# Altium PCB Board_LRA_Altium.pcbdoc
Units mil, origin at the board's own origin, x right, y up, seen from the top; angles counter-clockwise.
Board outline 2801.59 x 1943.74 mil, 2 copper layers (Top Layer, Bottom Layer); 24 components, 15 nets, 63 pads, 17 vias.
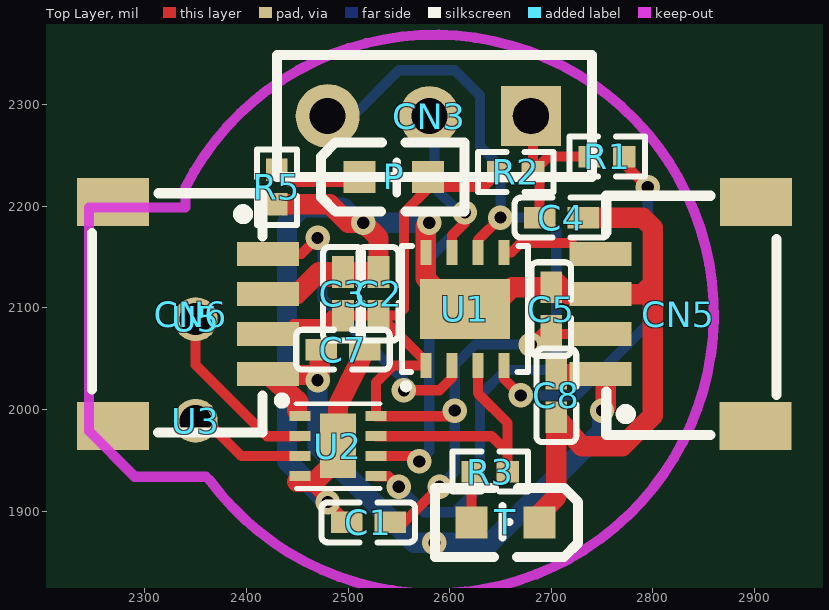
[diagram p0: Top Layer view]
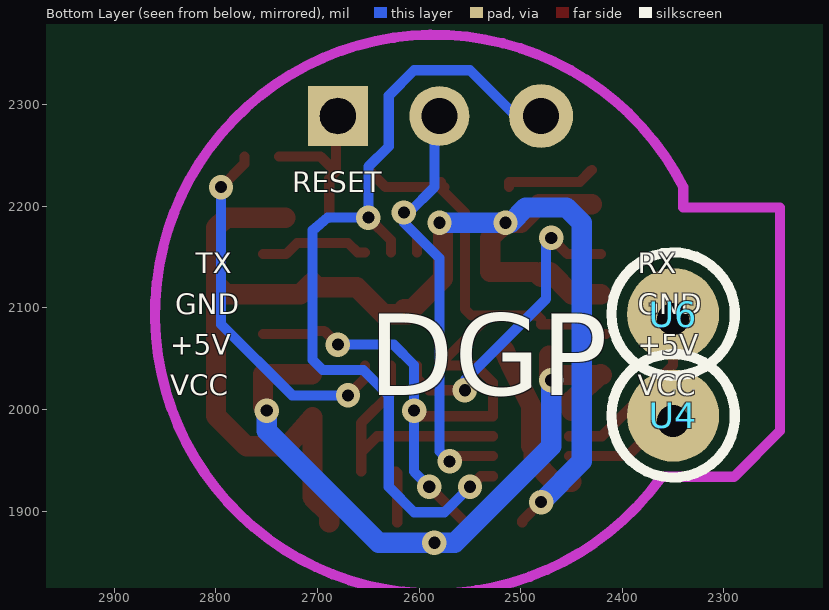
[diagram p1: Bottom Layer view, seen from below]

## Layer stack, top to bottom
Top Layer: signal copper (thickness not stored)
Dielectric: dielectric 12.6, FR-4, Dk 4.8
Bottom Layer: signal copper (thickness not stored)

## Board outline
3801.59,1000 1000,1000 1000,2943.74 3801.59,2943.74

## Components (designator, comment, footprint, x,y, rotation, side; value= is the part's Value field where it differs from the comment)
C1 "1uF" C0402 2520,1888.78 r0 top
C2 "100nF" C0402_NEW 2530,2113.78 r90 top
C3 "22uF" C0402 2495,2113.78 r270 top
C4 "100nF" C0402_NEW 2710,2188.78 r180 top
C5 "22uF" C0402 2700,2098.78 r270 top
C7 "22uF" C0402 2495,2058.78 r180 top
C8 "22uF" C0402 2705,2013.78 r90 top
CN3 "3 Pads Solder" 3PADS-JED 2580,2288.78 r270 top
CN5 "SM04B-SRSS-TB (LF)(SN)" CONN-SMD_4P-P1.00_SM04B-SRSS-TB-LF-SN 2825,2093.78 r90 top
CN6 "SM04B-SRSS-TB (LF)(SN)" CONN-SMD_4P-P1.00_SM04B-SRSS-TB-LF-SN 2345,2093.78 r270 top
P "19-213/GVC-CK0LLY/3T(HW)" LED0603-R-RD 2545,2228.78 r0 top
R1 "300Ω" R0402 2755,2248.78 r0 top
R2 "10kΩ" R0402 2665,2233.78 r180 top
R3 "1kΩ" R0402 2640,1938.78 r180 top
R5 "10kΩ" R0402 2430,2218.78 r90 top
T "19-213/GVC-CK0LLY/3T(HW)" LED0603-R-RD 2655,1888.78 r180 top
U1 "PIC16F18313-E/RF" DFN-8_L3.0-W3.0-P0.65-BL-EP 2615,2098.78 r0 top
U2 "DRV8837DSGR" WSON-8_L2.0-W2.0-P0.50-TL-EP 2490,1963.78 r0 top
U3 "Solder-Pad" SOLDER-PAD 2350,1988.78 r0 top
U4 "CONN-SMD_YTC1P-3015-01" CONN-SMD_YTC1P-3015-01 2350,1993.78 r0 bottom
U5 "Solder-Pad" SOLDER-PAD 2350,2088.78 r0 top
U6 "CONN-SMD_YTC1P-3015-01" CONN-SMD_YTC1P-3015-01 2350,2093.78 r0 bottom
? "" ? 2585,1634.94 r0 top
? "" ? 3149.79,2091.29 r0 top

## Footprints (in the part's own frame and the unit in brackets; to place one, negate y for a bottom-side part, rotate by r counter-clockwise, add the part's x,y. Pads: shape width x height; smd on the part's side, far side on the other; paste and mask are expansions set on the pad)
3PADS-JED [mm]
  rect 1.5x1.5 hole 0.9 slot 0.9 at 0 deg paste+0 mask+0.102: 1(0,2.54)
  round 1.5 hole 0.9 paste+0 mask+0.102: 2(0,0)
  round 1.6 hole 0.9 paste+0 mask+0.102: 3(0,-2.54)
  silkscreen extent -1.52,-3.81 1.52,4.06
C0402 [mm]
  rect 0.79x0.54 smd paste-100 mask+0.051: 1(-0.545,0) 2(0.545,0)
  silkscreen extent -1.17,-0.5 1.17,0.5
C0402_NEW [mm]
  rect 0.79x0.54 smd paste-100 mask+0.051: 1(-0.545,0) 2(0.545,0)
  silkscreen extent -1.17,-0.5 1.17,0.5
CONN-SMD_4P-P1.00_SM04B-SRSS-TB-LF-SN [mm]
  rect 0.6x1.55 smd paste+0 mask+0.051: 1(-1.5,1.938) 2(-0.5,1.938) 3(0.501,1.938) 4(1.5,1.938)
  rect 1.2x1.8 smd paste+0 mask+0.051: 5(2.8,-1.938) 6(-2.8,-1.938)
  silkscreen extent -3.02,-2.46 2.96,1.8
CONN-SMD_YTC1P-3015-01 [mm]
  round 2.3 smd paste+0 mask+0.05: 1(0,0)
  silkscreen extent -1.54,-1.54 1.55,1.54
DFN-8_L3.0-W3.0-P0.65-BL-EP [mm]
  rect 0.28x0.625 smd paste+0 mask+0.051: 1(-0.975,-1.412) 2(-0.325,-1.412) 3(0.325,-1.412) 4(0.975,-1.412) 5(0.975,1.412) 6(0.325,1.412) 7(-0.325,1.412) 8(-0.975,1.412)
  rect 2.25x1.5 smd paste+0 mask+0.051: 9(0,0)
  silkscreen extent -1.58,-2.01 1.58,1.58
LED0603-R-RD [mm]
  rect 0.8x0.8 smd paste+0 mask+0.051: 1(0.851,0) 2(-0.851,0)
  silkscreen extent -1.82,-0.86 1.77,0.86
R0402 [mm]
  rect 0.566x0.54 smd paste-100 mask+0.051: 1(-0.433,0) 2(0.433,0)
  silkscreen extent -0.94,-0.5 0.94,0.5
SOLDER-PAD [mm]
  round 1.1 hole 0.8 paste+0 mask+0.102: 1(0,0)
WSON-8_L2.0-W2.0-P0.50-TL-EP [mm]
  rect 0.521x0.25 smd paste+0 mask+0.051: 1(-0.95,0.75) 2(-0.95,0.25) 3(-0.95,-0.25) 4(-0.95,-0.75) 5(0.95,-0.75) 6(0.95,-0.25) 7(0.95,0.25) 8(0.95,0.75)
  rect 0.902x1.613 smd paste+0 mask+0.051: 9(0,0.013)
  silkscreen extent -1.47,-1.06 1.06,1.22
? [mil]

## Via types
v1: diameter 24.02, hole 12, Top Layer to Bottom Layer, tented both sides, 17 vias

## Nets (pads, with @x,y where several pads share a name; then routed paths per layer and width w, separated by ;. In a path a pad name is that pad's centre, name@x,y a point inside that pad or via, vN(x,y) a via of type N, cw(c..) or ccw(c..) an arc to the next point about the centre after c; other vN are vias at no path point)
+5V: C1.2 C2.1 C3.2 C5.2 CN5.2 CN6.3 P.1 R2.2 U1.1 U2.8 | length 952.2
  Top Layer w10: CN6.3@2416.3,2074.08 2436.8,2074.08 2446.5,2083.78 2480,2083.78 ; 2480,2088.78 2483.5,2092.28 C2.1 ; C1.2 2555,1888.78 v1(2590,1923.78) ; P.1@2575,2218.78 2633,2218.78 R2.2 ; P.1@2578.5,2223.78 2578.5,2217.28 2555,2193.78 2555,2098.78 2548.5,2092.28 C2.1 ; v1(2605,1998.78) 2599.5,1993.28 U2.8 2527.4,2026.18 2544.4,2043.18 U1.1 2576.6,2047.18 2531.5,2092.28 C2.1 ; v1(2680,2063.78) 2693.5,2077.28 2705,2077.28 2708.2,2074.08 CN5.2@2753.7,2074.08
  Bottom Layer w10: v1(2590,1923.78) 2605,1938.78 v1(2605,1998.78) 2605,2043.78 2625,2063.78 v1(2680,2063.78)
GND: C1.1 C2.2 C3.1 C4.1 C5.1 C7.1 C8.1 CN5.3 CN6.2 R5.1 T.2 U1.8 U1.9 U2.4 U2.9 | length 1763.5
  Top Layer w10: U2.4 2454.5,1934.28 v1(2480,1908.78) 2498.5,1890.28 C1.1
  Top Layer w20: CN6.2 2449.7,2113.48 2471.5,2135.28 2480,2135.28 ; R5.1@2430,2201.78 2482,2201.78 2500,2183.78 v1(2515,2183.78) 2530,2168.78 2530,2135.28 2485,2135.28 2480,2130.28 ; 2450,1928.78 2467.4,1928.78 2487.4,1948.78 U2.9@2487.4,1958.78 ; U2.9 2490,2003.78 2510,2043.78 C7.1 ; v1(2580,2183.78) 2576.6,2180.38 U1.8 2576.6,2128.78 2606.6,2098.78 U1.9 ; U1.9@2610,2093.78 2635,2093.78 2661.5,2120.28 C5.1@2705,2120.28 ; T.2 2688.5,1897.28 2705,1913.78 C8.1 2730,1963.78 2770,1963.78 2800,1993.78 2800,2138.78 ; C5.1@2705,2125.28 2716.8,2113.48 CN5.3@2753.7,2113.48 ; C4.1 2790,2188.78 2800,2178.78 2800,2123.78 2789.7,2113.48 CN5.3@2743.7,2113.48
  Bottom Layer w20: v1(2480,1908.78) 2440,1948.78 2440,2183.78 2455,2198.78 2495,2198.78 2510,2183.78 v1(2515,2183.78) v1(2580,2183.78)
OUT1: U2.2 U5.1 U6.1 | length 176.7
  Top Layer w10: U5.1 2350,2043.78 2420.16,1973.62 U2.2
OUT2: U2.3 U3.1 U4.1 | length 117
  Top Layer w10: U3.1 2360.4,1988.78 2395.2,1953.98 U2.3@2452.6,1953.98
P_2: P.2 R5.2 | length 91.5
  Top Layer w10: R5.2 2442,2223.78 2511.5,2223.78 P.2@2511.5,2218.78
RA0: CN3.2 U1.7 U2.6 | length 468.5
  Top Layer w10: U2.6@2527.4,1953.98 2564.8,1953.98 v1(2570,1948.78) ; U1.7 2602.2,2170.98 2615,2183.78 v1(2615,2193.78)
  Bottom Layer w10: v1(2570,1948.78) 2580,1958.78 2580,2148.78 2615,2183.78 v1(2615,2193.78) ; CN3.2@2585,2298.78 2585,2218.78 v1@2610,2193.78
RA1: CN3.3 U1.6 U2.5 | length 845.1
  Top Layer w10: U2.5@2527.4,1934.28 2539.5,1934.28 v1(2550,1923.78) ; U1.6 2627.8,2166.58 v1(2650,2188.78)
  Bottom Layer w10: CN3.3 2505,2288.78 2550,2333.78 2605,2333.78 2630,2308.78 2630,2258.78 2650,2238.78 v1(2650,2188.78) 2690,2188.78 2705,2176.28 2705,2048.78 2695,2038.78 2655,2038.78 2630,2013.78 2630,1923.78 2605,1898.78 2575,1898.78 v1(2550,1923.78)
RST: R1.2 U1.4 | length 364.8
  Top Layer w10: U1.4 2653.4,2030.38 v1(2670,2013.78) ; R1.2 2772,2241.78 v1(2795,2218.78)
  Bottom Layer w10: v1(2670,2013.78) 2725,2013.78 2795,2083.78 v1(2795,2218.78)
RX: CN6.1 U1.2 | length 307.9
  Top Layer w10: CN6.1@2421.3,2152.88 2454.1,2152.88 v1(2470,2168.78) ; v1(2555,2018.78) 2590,2018.78 2602.2,2030.98 U1.2
  Bottom Layer w10: v1(2470,2168.78) 2475,2168.78 2475,2108.78 2555,2028.78 v1(2555,2018.78)
S$9886: 
SLEEP: R3.1 U1.3 U2.7 | length 267
  Top Layer w10: U2.7 2641.3,1973.58 2657,1957.88 ; U1.3 2627.8,2015.98 2657,1986.78 R3.1 ; 2657,1973.78 2657.04,1959.41
SW: C4.2 CN3.1 R1.1 R2.1 | length 176.1
  Top Layer w10: CN3.1@2685,2298.78 2682,2295.78 R2.1 ; C4.2 2688.5,2227.28 R2.1 ; R1.1 2697,2248.78 R2.1
T_1: R3.2 T.1 | length 50.6
  Top Layer w10: T.1 2621.5,1937.28 R3.2
TX: CN5.4 U1.5 | length 108.7
  Top Layer w10: U1.5 2660.6,2154.38 2670,2163.78 2720,2163.78 2730.9,2152.88 CN5.4@2753.7,2152.88
VCC: C7.2 C8.2 CN5.1 CN6.4 U2.1 | length 658
  Top Layer w20: CN6.4@2420,2033.78 2465,2033.78 v1(2470,2028.78) 2472.2,2030.98 C7.2@2472.2,2052.88 ; CN6.4 2451.3,2007.48 ; 2450,1998.7 2450,2008.78 ; C8.2@2705.5,2034.68 2753.7,2034.68 v1@2753.7,2002.48
  Bottom Layer w20: v1(2470,2028.78) 2470,1963.78 2565,1868.78 v1(2585,1868.78) 2640,1868.78 2750,1978.78 v1(2750,1998.78)
pads on no net: CN5.5 CN5.6 CN6.5 CN6.6

## Polygon pours and split planes (outlines as drawn)
+5V on Top Layer (solid): 1500,2293.78 1500,1693.78 2110,1693.78 2115,1698.78 2115,2293.78 1500,2293.78

## Keep-outs
Keep-Out Layer:
  lines w10 net S$9886: 2339.94,2218.57 cw(c2585,2093.78) 2363.24,1931.15

## Silkscreen, mask and mechanical layers (free items; w line width, h text height)
Bottom Overlay:
  text "RESET" at 2725,2213.78 h20
  text "RX" at 2385,2133.78 h20
  text "TX" at 2820,2133.78 h20
  text "GND" at 2385,2093.78 h20
  text "GND" at 2840,2093.78 h20
  text "+5V" at 2385,2053.78 h20
  text "+5V" at 2845,2053.78 h20
  text "VCC" at 2385,2013.78 h20
  text "DGP" at 2650,2013.78 h80
  text "VCC" at 2845,2013.78 h20